# Altium PCB CONN-TH_BX-XH2.54-5PZZ-Y_2025-06-22.pcbdoc
Units mm, origin at the board's own origin, x right, y up, seen from the top; angles counter-clockwise.
Board outline 43.7 x 31.66 mm, 2 copper layers (Top Layer, Bottom Layer); 1 components, 0 nets, 5 pads, 0 vias.
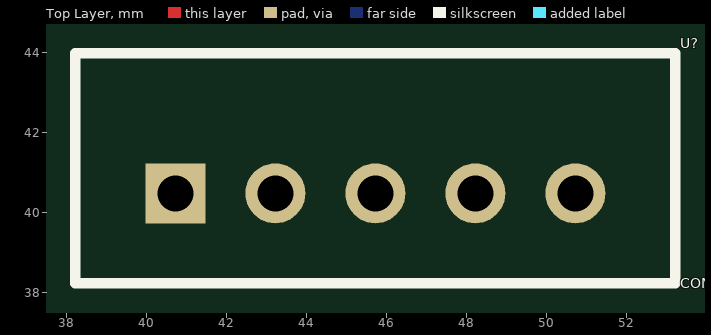
[diagram p0: Top Layer view]
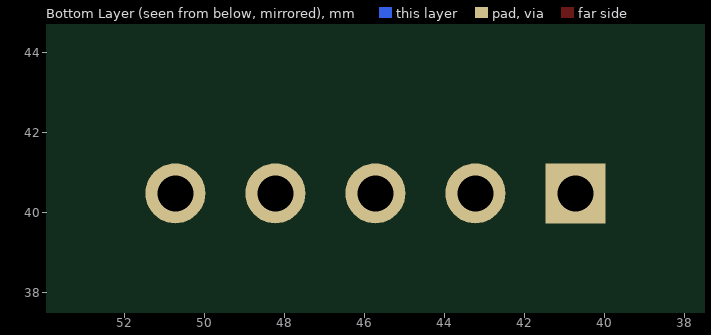
[diagram p1: Bottom Layer view, seen from below]

## Layer stack, top to bottom
Top Layer: signal copper (thickness not stored)
Dielectric: dielectric 0.32, FR-4, Dk 4.8
Bottom Layer: signal copper (thickness not stored)

## Board outline
69.102,25.4 25.4,25.4 25.4,57.058 69.102,57.058

## Components (designator, comment, footprint, x,y, rotation, side; value= is the part's Value field where it differs from the comment)
U? "CONN-TH_BX-XH2.54-5PZZ-Y" CONN-TH_BX-XH2.54-5PZZ-Y 45.727,41.102 r0 top

## Footprints (in the part's own frame and the unit in brackets; to place one, negate y for a bottom-side part, rotate by r counter-clockwise, add the part's x,y. Pads: shape width x height; smd on the part's side, far side on the other; paste and mask are expansions set on the pad)
CONN-TH_BX-XH2.54-5PZZ-Y [mm]
  rect 1.5x1.5 hole 0.9 paste+0 mask+0.05: 1(-5,-0.625)
  round 1.5 hole 0.9 paste+0 mask+0.05: 2(-2.5,-0.625) 3(0,-0.625) 4(2.5,-0.625) 5(5,-0.625)
  silkscreen extent -7.5,-2.88 7.5,2.88

## Nets (pads, with @x,y where several pads share a name; then routed paths per layer and width w, separated by ;. In a path a pad name is that pad's centre, name@x,y a point inside that pad or via, vN(x,y) a via of type N, cw(c..) or ccw(c..) an arc to the next point about the centre after c; other vN are vias at no path point)
pads on no net: U?.1 U?.2 U?.3 U?.4 U?.5

## Silkscreen, mask and mechanical layers (free items; w line width, h text height)
Document:
  lines w0.003: 47.251,41.229 47.251,41.229